# EAGLE board stm32-dip40 (EAGLE 6.4)
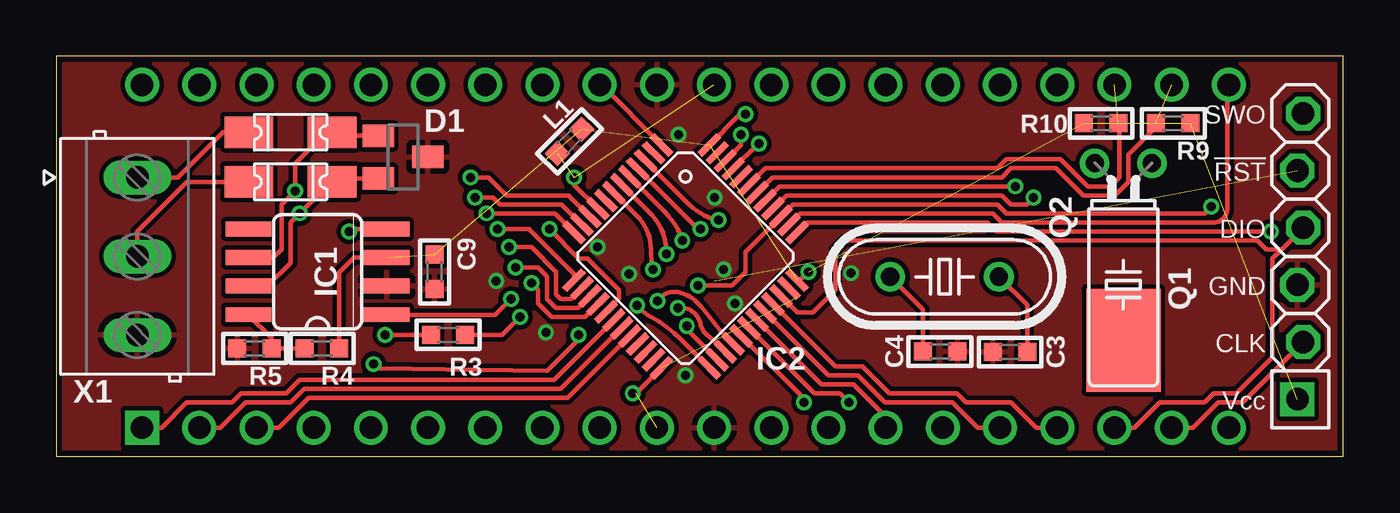
[diagram p0: board, top side]
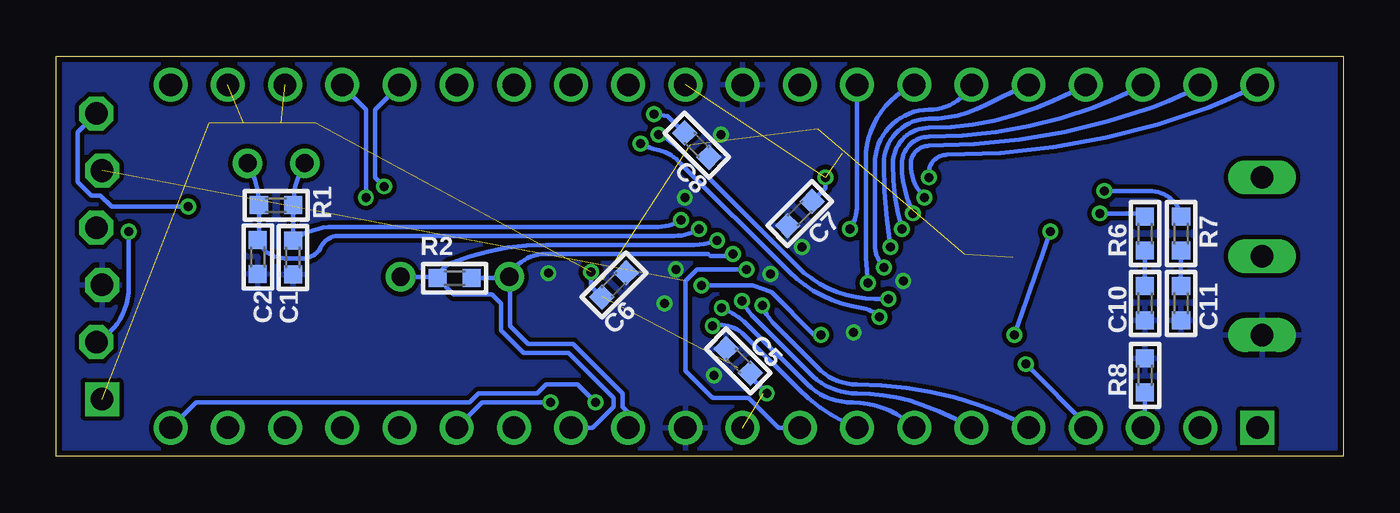
[diagram p1: board, bottom side, seen from below]

Size 57.15 x 17.78 mm. Coordinates in mm from the lower left corner, seen from the top.
Outline: 0,0 57.15,0 57.15,17.78 0,17.78 0,0
Copper layers (1*16): Top 0.035mm / dielectric 1.5mm / Bottom 0.035mm
Design rules "ITEADstudio_DRC": minimum track width 6mil, minimum drill 12mil, track to track 6mil, track to pad 6mil, pad to pad 6mil, via to via 6mil, smd to smd 0mil, copper to edge 10mil, drill to drill 10mil, minimum pad ring 10mil, minimum via ring 6mil, stop-mask expansion 2mil, vias tented up to drill 100mil, thermal gap 10mil

## Footprints (pad centres in the part's own frame; a part is rotated, then mirrored left to right if it is on the bottom)
C0603 = smd 0.8 x 0.8: 1 -0.762,0; 2 0.762,0
SOT23 = smd 1 x 1.4: 1 -0.95,-1.1; 2 0.95,-1.1; 3 0,1.1
1206L = smd 2.16 x 1.4: P$1 -1.85,0; P$2 1.85,0
SO08 = smd 0.66 x 2.032: 1 -1.905,-3.073; 2 -0.635,-3.073; 3 0.635,-3.073; 4 1.905,-3.073; 5 1.905,3.073; 6 0.635,3.073; 7 -0.635,3.073; 8 -1.905,3.073
LQFP48 = smd 0.3 x 1.2: 1 -2.75,-4.25; 2 -2.25,-4.25; 3 -1.75,-4.25; 4 -1.25,-4.25; 5 -0.75,-4.25; 6 -0.25,-4.25; 7 0.25,-4.25; 8 0.75,-4.25; 9 1.25,-4.25; 10 1.75,-4.25; 11 2.25,-4.25; 12 2.75,-4.25; 25 2.75,4.25; 26 2.25,4.25; 27 1.75,4.25; 28 1.25,4.25; 29 0.75,4.25; 30 0.25,4.25; 31 -0.25,4.25; 32 -0.75,4.25; 33 -1.25,4.25; 34 -1.75,4.25; 35 -2.25,4.25; 36 -2.75,4.25 | smd 1.2 x 0.3: 13 4.25,-2.75; 14 4.25,-2.25; 15 4.25,-1.75; 16 4.25,-1.25; 17 4.25,-0.75; 18 4.25,-0.25; 19 4.25,0.25; 20 4.25,0.75; 21 4.25,1.25; 22 4.25,1.75; 23 4.25,2.25; 24 4.25,2.75; 37 -4.25,2.75; 38 -4.25,2.25; 39 -4.25,1.75; 40 -4.25,1.25; 41 -4.25,0.75; 42 -4.25,0.25; 43 -4.25,-0.25; 44 -4.25,-0.75; 45 -4.25,-1.25; 46 -4.25,-1.75; 47 -4.25,-2.25; 48 -4.25,-2.75
DIP-40 = drill 1 square: 1 -24.13,-7.62 | drill 1: 2 -21.59,-7.62; 3 -19.05,-7.62; 4 -16.51,-7.62; 5 -13.97,-7.62; 6 -11.43,-7.62; 7 -8.89,-7.62; 8 -6.35,-7.62; 9 -3.81,-7.62; 10 -1.27,-7.62; 11 1.27,-7.62; 12 3.81,-7.62; 13 6.35,-7.62; 14 8.89,-7.62; 15 11.43,-7.62; 16 13.97,-7.62; 17 16.51,-7.62; 18 19.05,-7.62; 19 21.59,-7.62; 20 24.13,-7.62; 21 24.13,7.62; 22 21.59,7.62; 23 19.05,7.62; 24 16.51,7.62; 25 13.97,7.62; 26 11.43,7.62; 27 8.89,7.62; 28 6.35,7.62; 29 3.81,7.62; 30 1.27,7.62; 31 -1.27,7.62; 32 -3.81,7.62; 33 -6.35,7.62; 34 -8.89,7.62; 35 -11.43,7.62; 36 -13.97,7.62; 37 -16.51,7.62; 38 -19.05,7.62; 39 -21.59,7.62; 40 -24.13,7.62
L0603 = smd 0.8 x 0.8: 1 -0.762,0; 2 0.762,0
TC38H-G = drill 0.8: 1 -1.27,0; 2 1.27,0 | smd 3.302 x 4.572: GND 0,7.874
HC49/S = drill 0.813: 1 -2.413,0; 2 2.413,0
R0603 = smd 0.8 x 0.8: 1 -0.762,0; 2 0.762,0
JTAG6PIN = drill 1 square: 1 -6.35,0.127 | drill 1 octagon: 2 -3.81,-0.127; 3 -1.27,0.127; 4 1.27,-0.127; 5 3.81,0.127; 6 6.35,-0.127
DG350-3.5-03P = drill 1 long: 1 -3.5,0; 2 0,0; 3 3.5,0

## Placement (x,y rotation side)
C1  10pF  [C0603]  46.64,8.84 270 bottom
C2  10pF  [C0603]  48.2,8.86 270 bottom
C3  22pF  [C0603]  42.36,4.64 180 top
C4  22pF  [C0603]  39.25,4.66 0 top
C5  0.1  [C0603]  26.87,4.25 135 bottom
C6  0.1  [C0603]  32.38,7.62 45 bottom
C7  0.1  [C0603]  24.13,10.79 225 bottom
C8  0.1  [C0603]  28.71,13.84 315 bottom
C9  0.1  [C0603]  16.8,8.2 270 top
C10  560pF  [C0603]  8.8,6.8 270 bottom
C11  560pF  [C0603]  7.2,6.8 270 bottom
D1  PESD1CAN  [SOT23]  15.4,13.3 270 top
F1  0.2A  [1206L]  10.4,12.2 180 top
F2  0.2A  [1206L]  10.4,14.4 180 top
IC1  TODO AMIS30663CANG2G  [SO08]  11.6,8.2 90 top
IC2  STM32F103C8  [LQFP48]  27.94,8.89 225 top
J1  DIP-40  [DIP-40]  27.94,8.89 0 top
L1  bead  [L0603]  22.79,14 225 top
Q1  32768Hz  [TC38H-G]  47.39,13.03 180 top
Q2  8MHz  [HC49/S]  39.45,7.98 180 top
R1  1M  [R0603]  47.39,11.16 180 bottom
R2  1M  [R0603]  39.46,7.92 0 bottom
R3  100  [R0603]  17.4,5.4 180 top
R4  0  [R0603]  11.8,4.8 180 top
R5  NC  [R0603]  8.8,4.8 0 top
R6  100  [R0603]  8.8,9.9 90 bottom
R7  100  [R0603]  7.2,9.9 90 bottom
R8  10K  [R0603]  8.8,3.6 90 bottom
R9  10K  [R0603]  49.6,14.8 0 top
R10  10K  [R0603]  46.4,14.8 180 top
SWD1  SWD-6  [JTAG6PIN]  55.24,8.89 90 top
X1  DG3XX-03-3.5  [DG350-3.5-03P]  3.6,8.89 270 top

## Library data of the parts
C1-C11 L1 R1-R10 = rc-master-smd
D1 = protect
F1 F2 = ptc-littlefuse
IC1 = interfaces
IC2 = stm32
J1 = stamp
Q1 = crystal
Q2 = discrete
SWD1 = jtag
X1 = degson

## Nets
!RESET: IC2.7 J1.9 SWD1.5
+3V3: C5.1 C6.1 C8.1 C9.1 IC1.3 IC2.24 IC2.36 IC2.48 J1.10 L1.1 R4.1 R9.2 R10.2 SWD1.1
AVCC: C7.1 IC2.9 J1.30 L1.2
BOOT0: IC2.44
CAN_CTRL: IC1.8 R4.2 R5.2
CAN_H: F1.P$2 X1.2
CAN_L: F2.P$2 X1.1
CAN_RX: IC2.45 R3.1
CAN_TX: IC1.1 IC2.46
GND: C1.2 C2.2 C3.2 C4.2 C5.2 C6.2 C7.2 C8.2 C9.2 C10.2 C11.2 D1.3 IC1.2 IC2.8 IC2.23 IC2.35 IC2.47 J1.11 J1.31 R5.1 R8.2 SWD1.3 X1.3
I2C1_SCL: IC2.42 J1.22 R9.1
I2C1_SDA: IC2.43 J1.23 R10.1
N$7: IC1.4 R3.2
N$51: D1.2 F1.P$1 IC1.7 R6.2
N$52: D1.1 F2.P$1 IC1.6 R7.2
N$54: C11.1 R7.1
N$55: C10.1 R6.1
OSC32_IN: C1.1 IC2.3 Q1.2 R1.1
OSC32_OUT: C2.1 IC2.4 Q1.1 R1.2
PA0: IC2.10 J1.40
PA1: IC2.11 J1.39
PA2: IC2.12 J1.38
PA3: IC2.13 J1.37
PA4: IC2.14 J1.36
PA5: IC2.15 J1.35
PA6: IC2.16 J1.34
PA7: IC2.17 J1.33
PA8: IC2.29 J1.20
PA15: IC2.38 J1.21
PB0: IC2.18 J1.1
PB1: IC2.19 J1.2
PB2: IC2.20 J1.3 R8.1
PB3/SWO: IC2.39 J1.4 SWD1.6
PB4: IC2.40 J1.24
PB5: IC2.41 J1.25
RXD1: IC2.31 J1.14
SPI2_MISO: IC2.27 J1.7
SPI2_MOSI: IC2.28 J1.6
SPI2_NSS: IC2.25 J1.5
SPI2_SCK: IC2.26 J1.8
SWCLK: IC2.37 J1.19 SWD1.2
SWDIO: IC2.34 J1.18 SWD1.4
TXD1: IC2.30 J1.15
USBDM: IC2.32 J1.16
USBDP: IC2.33 J1.17
VBAT: IC2.1 J1.32
XTAL1: C3.1 IC2.5 J1.13 Q2.1 R2.1
XTAL2: C4.1 IC2.6 J1.12 Q2.2 R2.2

## Tracks (layer width: path | path; a pad name or v marks a point on that pad's centre or on a via)
!RESET  (via drill 0.4)  (1 unrouted)
  Top 0.2: IC2.7 25.8,10.68 arc-46 26.4,9.2 arc14 v26.5,8.3
  Bottom 0.2: J1.9 25.07,1.27 26.4,2.6 28,2.6 29.2,3.8 29.2,7.8 28.7,8.3 v26.5,8.3
+3V3  (via drill 0.4)  (9 unrouted)
  Top 0.2: IC2.24 25.74,2.8 v25.6,2.8 | R4.1 12.56,8.16 13.23,8.84 IC1.3 | IC2.48 30.3,15.14 v30.6,15.2 | v33.4,8.2 33.03,7.83 IC2.36
  Bottom 0.2: v25.6,2.8 26.33,3.53 C5.1 | C6.1 33.4,7.56 v33.4,8.2 | C8.1 30,15.12 v30.6,15.2
AVCC  (via drill 0.4)  (2 unrouted)
  Top 0.2: IC2.9 23,12.06 v23,12.4
  Bottom 0.2: v23,12.4 23,11.93 C7.1
CAN_CTRL
  Top 0.2: IC1.8 9.56,5.26 R5.2 R4.2
CAN_H
  Top 0.2: F1.P$2 5.8,12.2 3.6,10 X1.2
CAN_L
  Top 0.2: F2.P$2 7.4,14.4 5.4,12.4 X1.1
CAN_RX  (via drill 0.4)
  Top 0.2: v20.6,6.2 19.8,5.4 R3.1 | IC2.45 31.18,13.9 v31.2,13.9
  Bottom 0.2: v20.6,6.2 arc-37 21.4,6.6 arc37 24.6,8.2 29.51,13.11 arc-32 30.4,13.6 arc16 v31.2,13.9
CAN_TX  (via drill 0.4)
  Top 0.2: v20.2,7 19.5,6.29 IC1.1 | IC2.46 30.4,13.82 v30.4,14.3
  Bottom 0.2: v20.2,7 20.8,7 arc46 24.25,8.45 29.3,13.5 arc-18 v30.4,14.3
GND  (via drill 0.4)
  other vias: 24.04,9.3 27.64,14.3 29.64,8.3 27.94,3.6 35.3,8.14 30.14,6.8 25.44,8.1 29.24,11.5 21.74,5.5 19.54,7.8
  pour Top (isolate 0.203): -1.27,19.05 58.42,19.05 58.42,-1.27 -1.27,-1.27
  pour Bottom (isolate 0.203): -2.54,20.32 59.69,20.32 59.69,-2.54 -2.54,-2.54
I2C1_SCL  (1 unrouted)
  Top 0.2: IC2.42 31.8,12.4 42,12.4 42.4,12.8 44.4,12.8 45.6,11.6 47,11.6 47.6,12.2 47.6,13.4 48.84,14.64 R9.1
I2C1_SDA  (1 unrouted)
  Top 0.2: IC2.43 31.5,12.8 41.8,12.8 42.2,13.2 44.6,13.2 45.8,12 46.8,12 47.2,12.4 47.2,14.76 R10.1
N$7  (via drill 0.4)
  Top 0.2: R3.2 v14.6,5.4 | v13,10 13.11,10.11 IC1.4
  Bottom 0.2: v14.6,5.4 v13,10
N$51  (via drill 0.4)
  Top 0.2: D1.2 12.4,12.35 F1.P$1 12.2,12.2 v10.8,10.8 10.4,10.4 10.4,8.6 9.37,7.57 IC1.7
  Bottom 0.2: v10.8,10.8 8.94,10.8 R6.2
N$52  (via drill 0.4)
  Top 0.2: D1.1 12.4,14.25 F2.P$1 12,14.4 10.6,13 v10.6,11.8 10,11.2 10,9.2 9.63,8.84 IC1.6
  Bottom 0.2: v10.6,11.8 8.6,11.8 arc78 R7.2
N$54
  Bottom 0.2: C11.1 R7.1
N$55
  Bottom 0.2: C10.1 R6.1
OSC32_IN  (via drill 0.4)
  Top 0.2: IC2.3 28.11,11.2 arc33 v29.4,10.5
  Bottom 0.2: C1.1 46.63,9.61 R1.1 arc30 Q1.2 | C1.1 | C1.1 arc36 44.8,10.2 30.4,10.2 arc-33 v29.4,10.5
OSC32_OUT  (via drill 0.4)
  Top 0.2: IC2.4 28.5,10.1 v28.6,10.1
  Bottom 0.2: C2.1 48.15,9.67 R1.2 arc-30 Q1.1 | C2.1 48.2,9.6 | C2.1 arc-69 47,8.8 46.2,8.8 arc-64 45.4,9.3 arc64 44.6,9.8 29.7,9.8 arc-31 v28.6,10.1
PA0  (via drill 0.4)
  Top 0.2: IC2.10 22.75,11.6 20,11.6 19.2,12.4 v18.4,12.4
  Bottom 0.2: v18.4,12.4 18.4,12.6 arc90 17.6,13.4 arc-21 6,15.5 arc-8 J1.40
PA1  (via drill 0.4)
  Top 0.2: IC2.11 22.45,11.2 19.7,11.2 19.4,11.5 v18.6,11.5
  Bottom 0.2: v18.6,11.5 arc44 19.2,13 arc90 18.4,13.8 arc-19 8.5,15.5 arc-11 J1.39
PA2  (via drill 0.4)
  Top 0.2: IC2.12 22.14,10.8 v19.1,10.8
  Bottom 0.2: v19.1,10.8 arc26 19.6,13 arc90 18.4,14.2 arc-20 11.1,15.5 arc-9 J1.38
PA3  (via drill 0.4)
  Top 0.2: v19.6,10.1 21,10.1 22.99,8.11 IC2.13
  Bottom 0.2: v19.6,10.1 arc16 20,13 arc90 18.4,14.6 arc-21 13.6,15.5 arc-7 J1.37
PA4  (via drill 0.4)
  Top 0.2: IC2.14 22.87,7 22.4,7 22.2,7.2 22.2,8.2 21.1,9.3 v20.1,9.3
  Bottom 0.2: v20.1,9.3 arc9 20.4,13 arc90 18.4,15 arc-27 15.9,15.6 arc3 J1.36
PA5  (via drill 0.4)
  Top 0.2: IC2.15 23.18,6.6 22.2,6.6 21.8,7 21.8,8 21.4,8.4 v20.4,8.4
  Bottom 0.2: v20.4,8.4 arc44 20.8,9.4 20.8,13 arc90 18.4,15.4 arc-61 J1.35
PA6  (via drill 0.4)
  Top 0.2: IC2.16 23.48,6.2 22,6.2 21.4,6.8 21.4,7.4 v21.1,7.7
  Bottom 0.2: v21.1,7.7 arc7 21.2,9.4 21.2,13.2 arc66 J1.34
PA7  (via drill 0.4)
  Top 0.2: IC2.17 25,7.01 25,7.4 23.6,8.8 23.2,8.8 v21.9,10.1
  Bottom 0.2: J1.33 21.59,11.21 arc31 v21.9,10.1
PA8  (via drill 0.4)
  Top 0.2: IC2.29 33.2,2.57 v33.2,2.4
  Bottom 0.2: v33.2,2.4 34,3.2 35.4,3.2 35.8,2.8 38.4,2.8 38.8,2.4 50.94,2.4 J1.20
PA15
  Top 0.2: IC2.38 33.03,10.8 41.6,10.8 42,10.4 51.4,10.4 arc90 52,11 52,16.44 J1.21
PB0
  Top 0.2: IC2.18 22.1,3.4 10.8,3.4 10.2,2.8 8.2,2.8 7.8,2.4 5.8,2.4 4.67,1.27 J1.1
PB1
  Top 0.2: IC2.19 22.4,3 11,3 10.4,2.4 8.4,2.4 7.27,1.27 J1.2
PB2
  Top 0.2: IC2.20 22.71,2.6 11.2,2.6 9.87,1.27 J1.3
  Bottom 0.2: R8.1 8.8,1.36 J1.3
PB3/SWO  (via drill 0.4)
  Top 0.2: v51.3,11.1 51,10.8 42.2,10.8 41.8,11.2 32.73,11.2 IC2.39 30.6,9.07 30.6,8.2 30,7.6 v28.5,7.6 | v14.1,4.1 14.3,3.9 21.8,3.8 23.2,5.2 v23.2,5.4
  Bottom 0.2: v51.3,11.1 54.7,11.1 55.2,11.6 55.6,11.6 56.2,12.2 56.2,14.41 SWD1.6 | J1.4 11.27,1.27 v14.1,4.1 | v23.2,5.4 23.5,5.4 25.4,7.3 26.2,7.6 v28.5,7.6
PB4  (via drill 0.4)
  Top 0.2: IC2.40 32.42,11.6 42,11.6 42.4,11.2 43.1,11.2 v43.4,11.5
  Bottom 0.2: v43.4,11.5 43.4,15.4 44.45,16.45 J1.24
PB5  (via drill 0.4)
  Top 0.2: IC2.41 32.11,12 v42.6,12
  Bottom 0.2: v42.6,12 43,12.4 43,15.4 41.91,16.49 J1.25
RXD1
  Top 0.2: IC2.31 33.98,3.2 35.4,3.2 36.83,1.77 J1.14
SPI2_MISO  (via drill 0.4)
  Top 0.2: v27.6,6.6 arc-49 28.3,6.4 arc-37 28.6,5.9 arc37 28.9,5.4 arc-5 IC2.27
  Bottom 0.2: J1.7 arc-45 21.8,2.4 arc44 23.8,3.2 26.4,5.8 arc-23 v27.6,6.6
SPI2_MOSI  (via drill 0.4)
  Top 0.2: v26.7,6.9 arc-70 27.6,7.3 arc-34 28.45,6.85 arc-10 29,6.2 arc12 IC2.28
  Bottom 0.2: J1.6 arc-11 18.7,2.3 arc-20 21.6,2.8 arc42 23.55,3.55 26.1,6.1 arc16 v26.7,6.9
SPI2_NSS  (via drill 0.4)
  Top 0.2: IC2.25 27.74,5.2 arc17 26.4,6.2 arc-23 v25.8,6.7
  Bottom 0.2: J1.5 arc-12 16.2,2.3 arc-19 21.6,3.2 arc46 23.35,3.95 25.2,5.8 arc23 v25.8,6.7
SPI2_SCK  (via drill 0.4)
  Top 0.2: IC2.26 28,5.65 v28,5.8
  Bottom 0.2: J1.8 arc23 24.2,3 26.6,5.4 arc-58 v28,5.8
SWCLK  (via drill 0.4)
  Top 0.2: v53.93,10 41.74,10 41.34,10.4 33.34,10.4 IC2.37 | J1.19 50.47,1.27 51.6,2.4 52.7,2.4 53.1,2.8 53.8,3.51 SWD1.2
  Bottom 0.2: v53.93,10 53.93,7.52 arc61 SWD1.2
SWDIO
  Top 0.2: IC2.34 32.91,6.4 33.6,6.4 34.6,7.4 34.6,9.2 35,9.6 53.33,9.6 53.73,9.2 54.41,9.2 | 54.41,9.2 SWD1.4 | J1.18 47.87,1.27 49,2.4 51,2.4 51.4,2.8 52.4,2.8 54,4.4 54,8.79 54.41,9.2
TXD1  (via drill 0.4)
  Top 0.2: IC2.30 33.68,2.8 34.8,2.8 v35.2,2.4
  Bottom 0.2: v35.2,2.4 38.24,2.4 J1.15
USBDM
  Top 0.2: IC2.32 34.29,3.6 35.6,3.6 36.8,2.4 39.8,2.4 40.93,1.27 J1.16
USBDP
  Top 0.2: IC2.33 34.6,4 35.8,4 37,2.8 40,2.8 40.4,2.4 42.4,2.4 43.53,1.27 J1.17
VBAT
  Top 0.2: IC2.1 24.21,16.51 J1.32
XTAL1  (via drill 0.4)
  Top 0.2: IC2.5 27,10.89 arc-26 v27.8,9.6 | C3.1 43.12,6.72 Q2.1
  Bottom 0.2: R2.1 40.28,7.98 Q2.1 | R2.1 arc52 39.6,8.6 arc22 35.4,9.4 28.8,9.4 arc-23 v27.8,9.6 | J1.13 33.33,1.27 32.4,2.2 32.4,2.6 34.4,4.6 36.4,4.6 37.4,5.6 37.4,6.8 37.8,7.2 39.5,7.2 R2.1
XTAL2  (via drill 0.4)
  Top 0.2: IC2.6 26.3,10.88 arc-46 v27.1,9 | C4.1 38.49,6.53 Q2.2
  Bottom 0.2: v27.1,9 27.2,8.9 28.1,8.9 28.2,9 35.4,9 arc-64 Q2.2 | Q2.2 37.1,7.92 R2.2 | J1.12 31.75,1.95 32,2.2 32,2.8 34.2,5 36.2,5 37,5.8 37,7.94 Q2.2